# Altium PCB DE-060718.PcbDoc
Units mm, origin at the board's own origin, x right, y up, seen from the top; angles counter-clockwise.
Board outline 99.21 x 26.19 mm, 2 copper layers (Top Layer, Bottom Layer); 58 components, 38 nets, 211 pads, 34 vias.
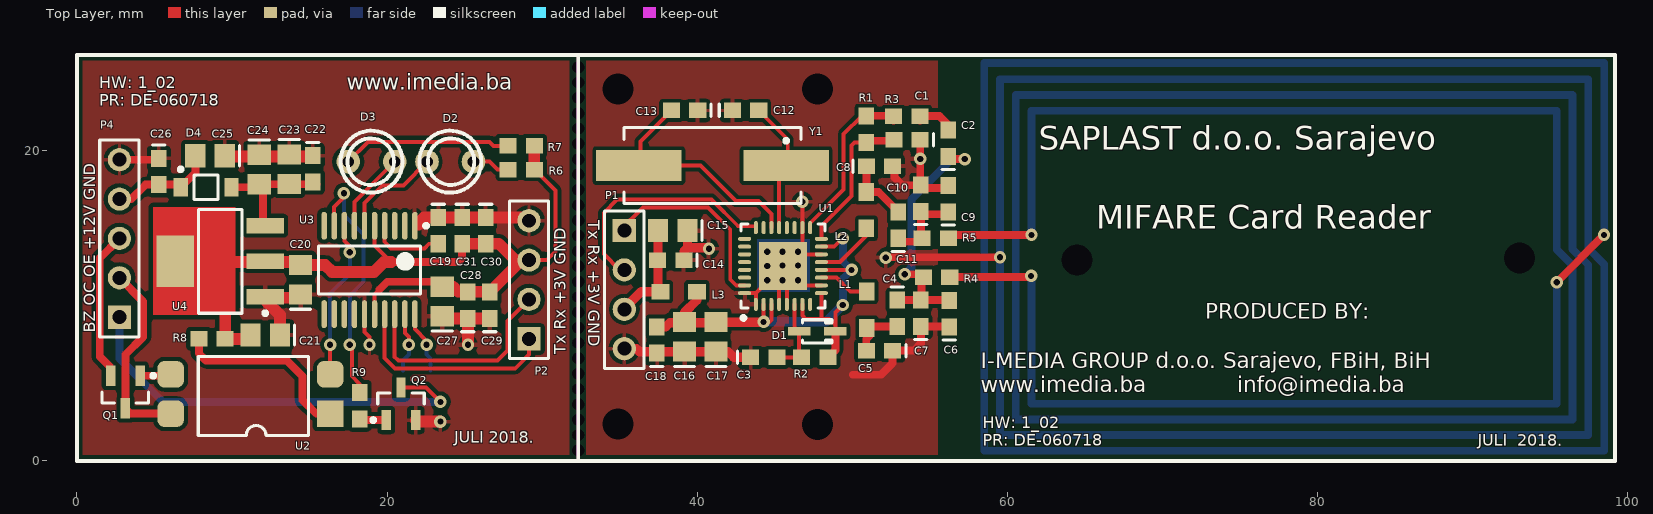
[diagram p0: Top Layer view]
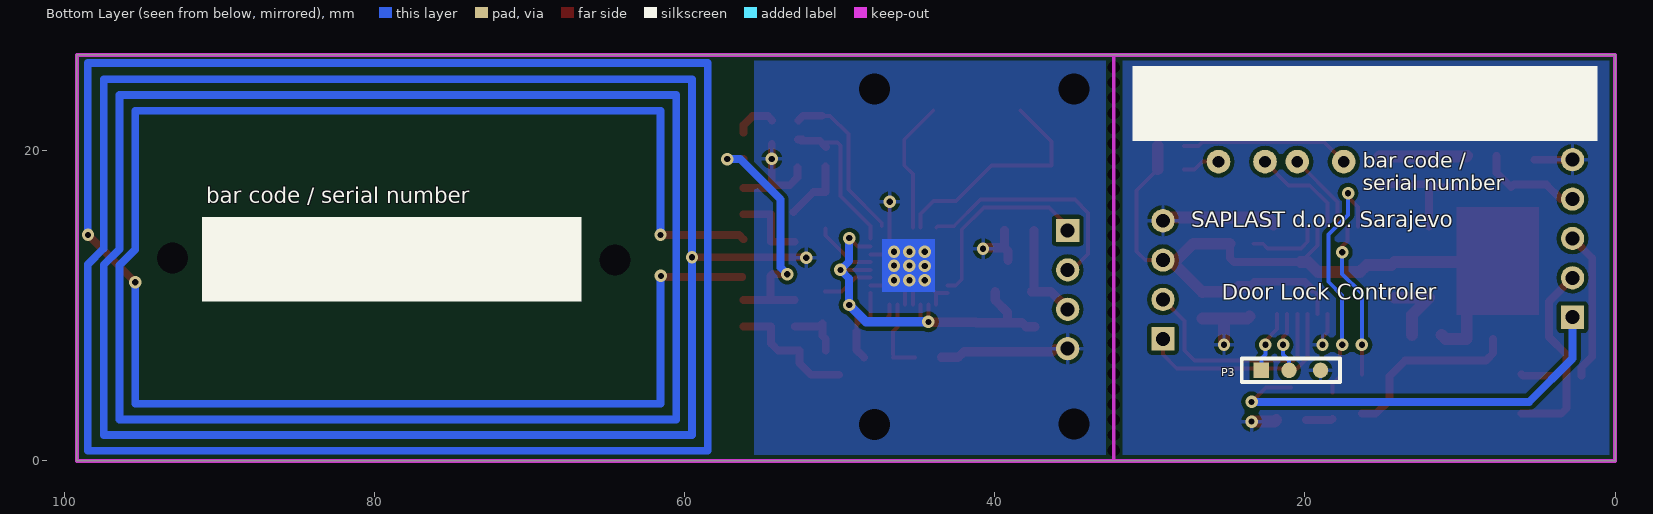
[diagram p1: Bottom Layer view, seen from below]

## Layer stack, top to bottom
Top Solder: solder mask 0.0102, Solder Resist, Dk 3.5
Top Layer: signal copper 0.0356
Dielectric 1: dielectric 0.32, FR-4, Dk 4.8
Bottom Layer: signal copper 0.0356
Bottom Solder: solder mask 0.0102, Solder Resist, Dk 3.5

## Board outline
0,0 0,26.187 99.212,26.187 99.212,0

## Design rules (kind name [scope] priority, off if disabled: settings)
Clearance [All] p1: gap=0.254 ignorepadtopadclearanceinfootprint=FALSE
PolygonConnect [All] p1: connectstyle=Relief reliefconductorwidth=0.254 reliefentries=4 polygonreliefangle="90 Angle" airgapwidth=0.254
RoutingVias [All] p1: holewidth=0.711 width=1.27 viastyle="Through Hole" minholewidth=0.711 minwidth=1.27 maxholewidth=0.711 maxwidth=1.27
SolderMaskExpansion [All] p1: expansion=0.102
Width [All] p1: maxlimit=3 minlimit=0.254 preferedwidth=0.762
30 further rules are at their usual default settings.

## Components (designator, comment, footprint, x,y, rotation, side; value= is the part's Value field where it differs from the comment)
C1 "100nF" 0603 53.543,20.726 r180 top
C2 "1nF" 0603 56.21,20.498 r90 top
C3 "1uF" 0603 44.298,6.68 r0 top
C4 "22pF" 0603 52.908,9.525 r270 top value=15pF
C5 "220pF" 0603 51.765,7.112 r180 top value=47pF
C6 "NF" 0603 56.261,9.5 r90 top value=33pF
C7 "100pF" 0603 54.432,9.525 r90 top value=10pF
C8 "220pF" 0603 51.765,18.999 r0 top value=47pF
C9 "NF" 0603 56.21,16.916 r90 top value=33pF
C10 "100pF" 0603 54.432,16.942 r90 top value=10pF
C11 "22pF" 0603 52.984,15.215 r90 top value=15pF
C12 "15pF" 0603 43.129,22.606 r0 top
C13 "15pF" 0603 39.192,22.606 r180 top
C14 "100nF" 0603 38.303,12.954 r180 top
C15 "10uF" 0805 38.43,14.859 r180 top
C16 "10uF" 0805 39.192,8.001 r90 top
C17 "10uF" 0805 41.224,8.001 r90 top
C18 "100nF" 0603 37.414,7.798 r90 top
C19 "100nF" 0603 23.317,14.859 r270 top
C20 "10uF" 0805 14.427,11.684 r90 top
C21 "10uF" 0805 12.141,8.128 r180 top
C22 "100nF" 0603 15.215,18.847 r270 top
C23 "10uF" 0805 13.691,18.821 r270 top
C24 "10uF" 0805 11.76,18.796 r270 top
C25 "10uF" 0805 8.585,19.685 r180 top
C26 "100nF" 0603 5.283,18.669 r270 top
C27 "10uF" 0805 23.571,10.287 r90 top
C28 "100nF" 0603 25.222,10.033 r90 top
C29 "100nF" 0603 26.619,10.033 r90 top
C30 "1uF" 0603 26.365,14.859 r270 top
C31 "10nF" 0603 24.841,14.859 r270 top
D1 "1N4148" SOD323 47.752,8.357 r0 top
D2 "LED_1" "LED 3mm" 24.079,19.304 r0 top
D3 "LED_2" "LED 3mm" 18.999,19.304 r180 top
D4 "ZD6V8" ONSC-SOD-123-2-425-04_V 8.331,17.653 r0 top
L1 "560nH" SMD-0805 50.952,9.754 r270 top
L2 "560nH" SMD-0805 50.927,16.18 r90 top
L3 "74279207" SMD-0805 38.811,10.922 r0 top
P1 "uC" HDR1X4 35.306,14.859 r270 top
P2 "MFRC" HDR1X4 29.159,7.874 r90 top
P3 "ICSP" ICSP 21.031,5.842 r180 bottom
P4 "CON1" HDR1X5 2.743,9.271 r90 top
Q1 "MMBT2222" SOT23_N 3.124,4.445 r270 top
Q2 "MMBT2222" SOT23_N 20.904,3.683 r90 top
R1 "1K8" ERA-0603 50.902,21.387 r90 top
R2 "10K" ERA-0603 47.6,6.68 r0 top
R3 "1K8" ERA-0603 53.518,22.225 r180 top
R4 "1R8" ERA-0603 55.448,11.862 r180 top
R5 "1R8" ERA-0603 55.372,14.351 r180 top
R6 "120R" ERA-0603 28.651,18.796 r180 top
R7 "120R" ERA-0603 28.651,20.32 r180 top
R8 "120R" ERA-0603 8.712,7.874 r0 top
R9 "1K" ERA-0603 18.237,3.556 r90 top
U1 "MFRC522" QFN32 45.542,12.573 r90 top
U2 "PC817" SOP4 16.332,3.048 r180 top
U3 "STM32F030F4P6" STM-TSSOP20_N 18.872,12.319 r270 top
U4 "AMS1117-3.3" SOT-223_N 9.246,12.878 r180 top
Y1 "27,12 MHz" HC49/4H_SMX 40.996,19.05 r180 top

## Footprints (in the part's own frame and the unit in brackets; to place one, negate y for a bottom-side part, rotate by r counter-clockwise, add the part's x,y. Pads: shape width x height; smd on the part's side, far side on the other; paste and mask are expansions set on the pad)
0603 [mm] "Chip Capacitor; Body 1.6 x 0.8 mm (LxW typ)"
  rect 1.1x1 smd: 1(-0.85,0) 2(0.85,0)
  silkscreen extent -1.7,-0.4 -1.7,0.4
0805 [mm] "Chip Capacitor; Body 2.0 x 1.2 mm (LxW typ)"
  rect 1.3x1.5 smd: 1(-0.95,0) 2(0.95,0)
  silkscreen extent -1.9,-0.65 -1.9,0.65
ERA-0603 [mm] "Chip Resistor; Body 1.6 x 0.8 mm (LxW typ)"
  rect 1.1x1 smd: 1(-0.85,0) 2(0.85,0)
HC49/4H_SMX [mm] "Surface Mount Quartz Crystal; Body 13.4 (inc. leads) x 4.9 mm (LxW max)"
  rect 5.5x2 smd: 1(-4.75,0) 2(4.75,0)
  silkscreen extent -5.7,-2.45 5.7,2.45
HDR1X4 [mm] "Connector; Header; 4 Position"
  rect 1.5x1.5 hole 0.9: 1(0,0)
  round 1.5 hole 0.9: 2(2.54,0) 3(5.08,0) 4(7.62,0)
  silkscreen extent -1.27,-1.27 8.89,1.27
HDR1X5 [mm] "Connector; Header; 5 Position"
  rect 1.5x1.5 hole 0.9: 1(0,0)
  round 1.5 hole 0.9: 2(2.54,0) 3(5.08,0) 4(7.62,0) 5(10.16,0)
  silkscreen extent -1.27,-1.27 11.43,1.27
ICSP [mm] "3 PIN ICSP PROGRAMMER CONNECTION PADS"
  rect 1x1 smd: 1(-1.778,0)
  round 1 smd: 2(0,0) 3(2.032,0)
  silkscreen extent -3.05,-0.76 3.3,0.76
"LED 3mm" [mil] "LED 3mm"
  round 60 hole 30: 1(-59.06,0) 2(59.06,0)
  silkscreen extent -79,-79 79,79
ONSC-SOD-123-2-425-04_V [mm] "SOD, 2-Leads, Body 2.69x1.6mm"
  rect 0.91x1.22 smd: 1(-1.635,0) 2(1.635,0)
  silkscreen extent -1.76,-0.8 0.78,1.28, body extent -1.35,-0.8 1.35,0.8, height 1.35
QFN32 [mm] "32 pin QFN"
  oval 0.85x0.25 smd: 1(-2.475,1.75) 2(-2.475,1.25) 3(-2.475,0.75) 4(-2.475,0.25) 5(-2.475,-0.25) 6(-2.475,-0.75) 7(-2.475,-1.25) 8(-2.475,-1.75) 17(2.475,-1.75) 18(2.475,-1.25) 19(2.475,-0.75) 20(2.475,-0.25) 21(2.475,0.25) 22(2.475,0.75) 23(2.475,1.25) 24(2.475,1.75)
  oval 0.25x0.85 smd: 9(-1.75,-2.475) 10(-1.25,-2.475) 11(-0.75,-2.475) 12(-0.25,-2.475) 13(0.25,-2.475) 14(0.75,-2.475) 15(1.25,-2.475) 16(1.75,-2.475) 25(1.75,2.475) 26(1.25,2.475) 27(0.75,2.475) 28(0.25,2.475) 29(-0.25,2.475) 30(-0.75,2.475) 31(-1.25,2.475) 32(-1.75,2.475)
  rect 3.1x3.1 smd: 33(0,0)
  silkscreen extent -3.47,-2.7 2.7,2.7, body extent -2.55,-2.55 2.55,2.55, height 0.8
SMD-0805 [mm] "Chip Inductor, 2-Leads, Body 2.0x1.2x1.1 mm"
  rect 1.15x1 smd: 1(-1.175,0) 2(1.175,0)
  body extent -1,-0.6 1,0.6, height 1.1
SOD323 [mm] "SOD-323/SC-76; 2 Leads; Body 1.7 x 1.3 mm, (LxW)"
  rect 1.45x0.55 smd: 1(1.175,0) 2(-1.175,0)
  silkscreen extent -0.95,-0.75 0.95,0.75
SOP4 [mm]
  rect 1.7x1.7 smd: 1(0,0)
  rrect50% 1.7x1.7 smd: 2(0,-2.54) 3(10.287,-2.54) 4(10.287,0)
  silkscreen extent 1.4,-3.68 8.51,1.4
SOT23_N [mm] "SOT23, 3-Leads, Body 2.9x1.3mm, Pitch 0.95mm, Lead Span 2.3mm, IPC Medium Density"
  rect 1.3x0.6 smd: 1(-1.05,0.95) 2(-1.05,-0.95) 3(1.05,0)
  silkscreen extent -1.17,-1.5 0.7,1.93, body extent -0.7,-1.5 0.7,1.5, height 1.1
SOT-223_N [mm] "SOT223, 4-Leads, Body 6.5x3.5mm, Pitch 2.3mm, Lead Span 7mm, IPC Medium Density"
  rect 2.4x1 smd: 1(-2.9,2.3) 2(-2.9,0) 3(-2.9,-2.3)
  rect 2.4x3.3 smd: 4(2.9,0)
  silkscreen extent -3.03,-3.35 1.4,3.47, body extent -1.85,-3.35 1.85,3.35, height 1.8
STM-TSSOP20_N [mm] "SOP, 20-Leads, Body 6.6x4.5mm, Pitch 0.65mm, IPC Medium Density"
  oval 1.8x0.35 smd: 1(-2.85,2.925) 2(-2.85,2.275) 3(-2.85,1.625) 4(-2.85,0.975) 5(-2.85,0.325) 6(-2.85,-0.325) 7(-2.85,-0.975) 8(-2.85,-1.625) 9(-2.85,-2.275) 10(-2.85,-2.925) 11(2.85,-2.925) 12(2.85,-2.275) 13(2.85,-1.625) 14(2.85,-0.975) 15(2.85,-0.325) 16(2.85,0.325) 17(2.85,0.975) 18(2.85,1.625) 19(2.85,2.275) 20(2.85,2.925)
  silkscreen extent -2.97,-3.3 1.55,3.78, body extent -2.25,-3.3 2.25,3.3, height 1.2

## Part data
C1 C2 C3 C4 C5 C6 C7 C8 C9 C10 C11 C12 C13 C14 C18 C19 C22 C26 C28 C29 C30 C31: library part C0603, "Ceramic Chip Capacitor - Standard", PackageDocument=Mar-2001, Code_IPC="1608 [0603]", Code_JEITA=0603, ComponentLink1Description="Manufacturer Link", ComponentLink1URL=http://www.kemet.com/, ComponentLink2Description=Datasheet, ComponentLink2URL=http://www.kemet.com/kemet/web/homepage/kechome.nsf/vapubfilesname/F3102TA.pdf/$file/F3102TA.pdf, DatasheetDocument=Mar-2001, LatestRevisionDate=19-Mar-2004, LatestRevisionNote="Silkscreen size reduced.", Note="Footprint corresponds to dimensions for bulk cassette packaging. This case size has tightened tolerances.", PackageReference=0603, Published=17-Jul-2002, Publisher="Altium Limited"
C15 C16 C17 C20 C21 C23 C24 C25 C27: library part C0805, "Ceramic Chip Capacitor - Standard", PackageDocument=Mar-2001, Code_IPC=2012[0805], Code_JEITA=0805, ComponentLink1Description="Manufacturer Link", ComponentLink1URL=http://www.kemet.com/, ComponentLink2Description=Datasheet, ComponentLink2URL=http://www.kemet.com/kemet/web/homepage/kechome.nsf/vapubfilesname/F3102TA.pdf/$file/F3102TA.pdf, DatasheetDocument=Mar-2001, LatestRevisionDate=19-Mar-2004, LatestRevisionNote="Silkscreen size reduced.", Note="Footprint corresponds to dimensions for bulk cassette packaging. This case size has tightened tolerances.", PackageReference=0805, Published=17-Jul-2002, Publisher="Altium Limited"
D1: library part 1PS76SB10, "Schottky Barrier Diode", ComponentLink1Description="Manufacturer Link", ComponentLink1URL=http://www.semiconductors.philips.com/, ComponentLink2Description=Datasheet, ComponentLink2URL=http://www.semiconductors.philips.com/acrobat/datasheets/1PS76SB10_2.pdf, DatasheetVersion=14-Oct-1996, LatestRevisionDate=19-Mar-2004, LatestRevisionNote="Silkscreen size reduced.", PackageDescription="SOD-323/SC-76; 2 Leads; Body 1.7 x 1.3 mm, (LxW)", PackageReference=SOD323, PackageVersion=May-1999, Published=17-Sep-2003, Publisher="Altium Limited"
D2 D3: library part "LED 3mm"
D4: library part SZMMSZ6V8T1G, "Zener Voltage Regulator, 500 mW, 2-Pin SOD-123, Pb-Free, Tape and Reel", Manufacturer="On Semiconductor", Supplier Part Number 1=SZMMSZ6V8T1G-ND, ComponentLink1Description="Manufacturer URL", ComponentLink1URL=http://www.onsemi.com/, ComponentLink2Description=Datasheet, ComponentLink2URL=http://www.onsemi.com/pub_link/Collateral/MMSZ2V4T1-D.PDF, ComponentLink3Description="Package Specification", ComponentLink3URL=http://www.onsemi.com/pub_link/Collateral/425-04.PDF, DatasheetVersion="Rev. 11", Mounting Technology="Surface Mount", PackageDescription="2-Pin SOD, Body 1.6 x 2.69 mm", PackageReference=SOD-123-2-425-04, PackageVersion="Rev. G, 10/2009", Packing="Tape and Reel", PartNumber=SZMMSZ6V8T1G, P Max (W)=0.5, RoHS=Pb-Free, Supplier 1=Digi-Key, Supplier 2=Mouser, Supplier Part Number 2=863-SZMMSZ6V8T1G
L1 L2: library part 74279207, "SMD EMI Suppression Ferrite Bead WE-CBF, Z = 100 Ohm", ComponentLink1Description="Manufacturer URL", ComponentLink1URL=http://www.we-online.com, ComponentLink2Description=Datasheet, ComponentLink2URL=http://www.we-online.de/katalog/media/pdf/74279207.pdf, DatasheetVersion=Dec-2005, Impedance="100 Ohm", PackageDescription="Chip Inductor, 2-Leads, Body 2.0 x 1.2 mm", PackageReference=SMD-0805, PartNumber=74279207
L3: "SMD EMI Suppression Ferrite Bead WE-CBF, Z = 100 Ohm", ComponentLink1Description="Manufacturer URL", ComponentLink1URL=http://www.we-online.com, ComponentLink2Description=Datasheet, ComponentLink2URL=http://www.we-online.de/katalog/media/pdf/74279207.pdf, DatasheetVersion=Dec-2005, Impedance="100 Ohm", PackageDescription="Chip Inductor, 2-Leads, Body 2.0 x 1.2 mm", PackageReference=SMD-0805, PartNumber=74279207
P1 P2: library part "Header 4", "Header, 4-Pin", LatestRevisionDate=17-Jul-2002, LatestRevisionNote="Re-released for DXP Platform.", Publisher="Altium Limited"
P3: "ICSP connection pads"
P4: library part "Header 5", "Header, 5-Pin", LatestRevisionDate=17-Jul-2002, LatestRevisionNote="Re-released for DXP Platform.", Publisher="Altium Limited"
Q1 Q2: library part BC817, "NPN General-purpose Transistor", ComponentLink1Description="Manufacturer Link", ComponentLink1URL=http://www.semiconductors.philips.com/, ComponentLink2Description=Datasheet, ComponentLink2URL=http://www.semiconductors.philips.com/acrobat/datasheets/BC817_BC817W_BC337_5.pdf, DatasheetVersion=Jun-1999, LatestRevisionDate=12-Dec-2006, LatestRevisionNote="IPC-7351 Footprint Added.", PackageDescription="3-Pin SOT-23 Package 0.95 mm Pitch, 2.3 mm Lead Span", PackageReference=SOT23, PackageVersion=May-1999, Published=17-Sep-2003, Publisher="Altium Limited"
R1 R2 R3 R4 R5 R6 R7 R8 R9: library part ERJ3RS, "Low Ohmic Value Thick Film Chip Resistor, 0.1 Ohm to 0.2 Ohm Range, 1%, 2% and 5% Tolerance, 0603 Size, 0.1 W", PackageDocument=Mar-2003, Code_IPC="1608 [0603]", ComponentLink1Description="Manufacturer Link", ComponentLink1URL=http://www.panasonic.com/industrial/components/resistive_products.htm, ComponentLink2Description=Datasheet, ComponentLink2URL=http://www.panasonic.com/industrial/components/pdf/AOA0000CE3.pdf, LatestRevisionDate=19-Mar-2004, LatestRevisionNote="Silkscreen size reduced.", PackageReference=3-0603, Published=17-Dec-2003, Publisher="Altium Limited"
U1: "MIFARE reader writer"
U2: library part "PC817 optocoupler", "4-Pin Phototransistor Optocoupler", DatasheetVersion=Nov-2003, LatestRevisionDate=04-Mar-2005, LatestRevisionNote="Sch pins 3 & 4 Swapped.", PackageReference=DIP-4, Published=24-Mar-1999, Publisher="Altium Limited"
U3: "ARM Cortex-M0 32-bit MCU, 16 KB Flash, 4 KB Internal RAM, 15 I/Os, 20-pin TSSOP, -40 to 85 degC, Tube", I/Os (High Current)=15, Operating Frequency(F) (Processor speed) (MHz)=48, Supplier Part Number 1=497-14044-5-ND, Supply Voltage(Vcc) min (V)=2.4, ComponentLink1Description="Manufacturer URL", ComponentLink1URL=http://www.st.com/web/en/home.html, ComponentLink2Description=Datasheet, ComponentLink2URL=http://www.st.com/st-web-ui/static/active/en/resource/technical/document/datasheet/DM00088500.pdf, ComponentLink3Description="Package Specification", ComponentLink3URL=http://www.st.com/st-web-ui/static/active/en/resource/technical/document/datasheet/DM00065136.pdf, Core="ARM Cortex-M0", DatasheetVersion="Rev. 1", FLASH Size (Prog) (kB)=16, Internal RAM Size (kB)=4, Mounting Technology="Surface Mount", PackageDescription="20-Pin Thin Shrink Small Outline Package, 6.5 x 4.4 mm Body, 0.65 mm Pitch", PackageReference=TSSOP20, PackageVersion="Rev. 1, 11/2012", Packing=Tube, PartNumber=STM32F030F4P6, Supplier 1=Digi-Key, Supplier 2=Newark, Supplier 3=Mouser, Supplier Part Number 2=06X3648, Supplier Part Number 3=511-STM32F030F4P6
U4: library part LD1117AS33TR, "1A, Low Drop Positive Voltage Regulator, 3.3V, 4-Pin SOT-223, Tape and Reel", ComponentLink1Description="Manufacturer URL", ComponentLink1URL=http://www.st.com, ComponentLink2Description=Datasheet, ComponentLink2URL=http://www.st.com/internet/com/TECHNICAL_RESOURCES/TECHNICAL_LITERATURE/DATASHEET/CD00002116.pdf, DatasheetVersion=Dec-2011, PackageDescription="4-Pin SOT-223 Package, 6.5 x 3.5 mm Body, 2.3 mm Pitch, 7 mm Lead Span", PackageReference=SOT-223, PackageVersion=2010, PartNumber=LD1117AS33TR
Y1: library part HC49/4H_SMX, "Surface Mount Quartz Crystal", PackageDocument=18-Oct-1999, ComponentLink1Description="Manufacturer Link", ComponentLink1URL=http://www.cmac.com/mt/, ComponentLink2Description=Datasheet, ComponentLink2URL=http://www.cmac.com/mt/databook/crystals/smd/hc49_4h_smx.pdf, DatasheetDocument=18-Oct-1999, Note="PCB layout complies with manufacturer's recommendation.", PackageReference=HC49/4H_SMX, Published=17-Jul-2002, Publisher="Altium Limited"

## Free pads (board coordinates)
  round 0 hole 0.8: RUPA(32.334,0.686) RUPA(32.334,1.674) RUPA(32.334,2.663) RUPA(32.334,3.658) RUPA(32.334,4.64) RUPA(32.334,5.629) RUPA(32.334,6.617) RUPA(32.334,7.606) RUPA(32.334,8.594) RUPA(32.334,9.583) RUPA(32.334,10.571) RUPA(32.334,11.56) RUPA(32.334,12.549) RUPA(32.334,13.537) RUPA(32.334,14.526) RUPA(32.334,15.514) RUPA(32.334,16.503) RUPA(32.334,17.491) RUPA(32.334,18.48) RUPA(32.334,19.469) RUPA(32.334,20.457) RUPA(32.334,21.446) RUPA(32.334,22.434) RUPA(32.334,23.423) RUPA(32.334,24.411) RUPA(32.334,25.4)
  round 0 hole 2: RUPA(34.9,2.388) RUPA(34.9,24.003) RUPA(47.777,2.337) RUPA(47.777,24.003) RUPA(64.516,12.954) RUPA(93.04,13.081)

## Via types
v1: diameter 0.8, hole 0.4, Top Layer to Bottom Layer, 34 vias

## Nets (pads, with @x,y where several pads share a name; then routed paths per layer and width w, separated by ;. In a path a pad name is that pad's centre, name@x,y a point inside that pad or via, vN(x,y) a via of type N, cw(c..) or ccw(c..) an arc to the next point about the centre after c; other vN are vias at no path point)
+3V3: C20.2 C21.2 C27.2 C28.2 C29.2 C30.2 C31.2 P2.3 R6.1 R7.1 R8.2 U3.5 U3.16 U4.2 U4.4 | length 49.7
  Top Layer w0.254: U3.16 19.197,10.739 19.507,11.049 ; U3.5 19.197,13.899 20.269,12.827 ; P2.3 30.302,12.954 30.861,13.513 30.861,17.436 R6.1
  Top Layer w0.508: 19.507,11.049 20.015,11.557 23.251,11.557 C27.2 ; 20.269,12.827 24.587,12.827 24.841,13.081 C31.2
  Top Layer w0.737: C27.2 24.272,11.237 24.587,10.922 26.58,10.922 C29.2 P2.3@28.69,12.954 ; C31.2 C30.2 27.215,14.009 28.27,12.954 P2.3@28.69,12.954 ; P2.3 P2.3@28.69,12.954 ; R6.1 R7.1
  Top Layer w0.762: 9.562,9.867 R8.2 10.937,7.874 C21.2 ; 9.601,12.954 9.728,12.827 14.234,12.827 C20.2 16.017,12.634 16.459,12.192 19.163,12.192 19.798,12.827 20.269,12.827
+5V: C22.2 C23.2 C24.2 D4.2 U4.3 | length 8.4
  Top Layer w0.508: D4.2 11.567,17.653 C24.2 ; U4.3@11.993,15.127 11.993,17.613 C24.2 ; C22.2@15.47,17.846 13.792,17.846 C24.2
+12V: C25.2 C26.2 D4.1 P4.4 | length 6.8
  Top Layer w0.508: P4.4 3.505,16.891 4.433,17.819 C26.2 6.53,17.819 D4.1 7.635,18.592 C25.2
BUZZ: R9.2 U3.9 | length 16.4
  Top Layer w0.254: U3.9@16.586,15.113 16.586,16.383 17.221,17.018 v1(17.221,17.272) ; v1(17.602,7.493) 17.729,7.366 17.729,5.461 18.237,4.953 R9.2
  Bottom Layer w0.254: v1(17.221,17.272) 17.221,15.875 18.491,14.605 18.491,11.557 17.602,10.668 v1(17.602,7.493)
BUZZER: P4.1 Q2.3 | length 27.4
  Top Layer w0.254: Q2.3 22.521,4.733 v1(23.444,3.81)
  Bottom Layer w0.508: P4.1 2.743,6.604 5.537,3.81 v1(23.444,3.81)
DOOR_LOCK: U2.2 U3.8 | length 10.3
  Top Layer w0.254: U2.2 v1(16.332,7.493) ; U3.8 17.247,14.198 17.602,13.843 v1(17.602,13.462)
  Bottom Layer w0.254: v1(16.332,7.493) 16.332,10.795 17.602,12.065 v1(17.602,13.462)
LED_1: D2.1 U3.6 | length 6.6
  Top Layer w0.254: U3.6 18.547,16.634 19.694,17.78 21.055,17.78 D2.1
LED_2: D3.1 U3.7 | length 5.2
  Top Layer w0.254: U3.7 17.897,16.702 D3.1
NetC2_1: C2.1 C4.1 C6.2 C7.2 R4.2 | length 16.5
  Top Layer w0.508: C4.1 C7.2 C6.2@56.21,10.375 ; v1(53.391,12.04) 54.319,12.04 54.344,12.065 54.471,11.938 C7.2@54.471,10.414 ; C2.1@56.21,19.47 v1(57.263,19.47)
  Bottom Layer w0.508: v1(53.391,12.04) 53.823,12.471 53.823,16.866 56.427,19.47 v1(57.263,19.47)
NetC2_2: C2.2 R3.1 | length 2.7
  Top Layer w0.508: R3.1@54.368,21.971 54.647,22.25 55.626,22.25 56.21,21.666 C2.2@56.21,21.17
NetC3_2: C3.2 D1.2 R2.1 U1.6 | length 4.8
  Top Layer w0.254: C3.2 R2.1@46.577,6.68 ; U1.6 46.292,8.641 D1.2 R2.1@46.577,6.853
NetC4_2: C4.2 C5.2 L1.2 | length 3.7
  Top Layer w0.508: C5.2 50.915,7.862 51.13,8.077 51.13,8.858 51.313,8.675 C4.2
NetC8_1: C8.1 C11.2 L2.2 | length 4.2
  Top Layer w0.508: C8.1@50.927,18.987 L2.2 51.694,17.355 C11.2
NetC9_1: C9.1 C10.1 C11.1 R5.2 | length 5.1
  Top Layer w0.508: C11.1@52.908,14.136 54.432,14.136 54.432,15.914 C9.1@56.21,15.914
NetC19_2: C19.2 U3.4 | length 4.8
  Top Layer w0.254: U3.4 19.847,14.138 20.269,13.716 22.428,13.716 22.721,14.009 C19.2
NetD2_2: D2.2 R6.2 | length 2.4
  Top Layer w0.254: D2.2 26.619,19.304 27.127,18.796 R6.2
NetD3_2: D3.2 R7.2 | length 10.9
  Top Layer w0.254: D3.2 18.769,20.574 26.619,20.574 26.873,20.32 R7.2
NetQ1_1: Q1.1 U2.3 | length 2
  Top Layer w0.508: Q1.1 5.952,5.495 U2.3
NetQ2_1: Q2.1 R9.1 | length 1.7
  Top Layer w0.508: R9.1 18.31,2.633 Q2.1
NetR8_1: R8.1 U2.1 | length 11.9
  Top Layer w0.508: R8.1 7.862,6.946 8.331,6.477 13.538,6.477 14.554,5.461 14.554,3.937 15.443,3.048 U2.1
OSCIN: C12.2 U1.21 Y1.1 | length 8.6
  Top Layer w0.254: C12.2 45.847,20.738 45.847,19.05 45.292,18.495 U1.21
OSCOUT: C13.2 U1.22 Y1.2 | length 15
  Top Layer w0.254: C13.2 36.347,20.611 36.347,19.05 40.234,19.05 42.52,16.764 43.967,16.764 44.792,15.939 U1.22
OUT_C: P4.2 Q1.3 U2.4 | length 12.6
  Top Layer w0.508: P4.2 4.267,10.287 4.267,8.001 3.124,6.858 Q1.3 3.471,3.048 U2.4
OUT_E: P4.3 Q1.2 | length 9.7
  Top Layer w0.508: Q1.2 2.174,6.03 1.473,6.731 1.473,13.081 P4.3
RX: R1.2 R3.2 U1.17 | length 10.7
  Top Layer w0.254: U1.17@47.3,15.144 47.3,15.347 49.454,17.501 49.454,21.082 50.634,22.262 R1.2@51.156,22.262
  Top Layer w0.508: R1.2@51.156,22.262 52.377,22.262 R3.2@52.668,21.971
SWCLK: P3.1 U3.20 | length 4
  Top Layer w0.254: U3.20 21.797,8.505 22.555,7.747 v1(22.555,7.493)
  Bottom Layer w0.254: v1(22.555,7.493) 22.555,6.858 22.809,6.604 P3.1
SWDIO: P3.2 U3.19 | length 3.9
  Top Layer w0.254: U3.19 21.147,8.266 21.412,8.001 v1(21.412,7.493)
  Bottom Layer w0.254: P3.2 21.031,6.477 21.412,6.858 v1(21.412,7.493)
TX1: L1.1 U1.11 | length 3.3
  Top Layer w0.254: U1.11 48.985,11.823 49.879,10.929 L1.1
TX2: L2.1 U1.13 | length 4.1
  Top Layer w0.254: U1.13 49.221,12.823 50.927,14.529 L2.1
UART_RX: P1.2 U1.24 | length 15
  Top Layer w0.254: P1.2@35.001,12.319 33.985,13.335 33.985,16.002 34.849,16.866 40.927,16.866 42.654,15.138 43.696,15.138 U1.24@43.786,15.048
UART_TX: P1.1 U1.31 | length 12.7
  Top Layer w0.254: P1.1@35.001,14.859 36.5,16.358 40.716,16.358 42.139,14.935 42.139,11.709 42.525,11.323 U1.31
USART_RX: P2.2 U3.18 | length 14.3
  Top Layer w0.254: U3.18 20.497,6.713 20.734,6.477 27.127,6.477 27.762,7.112 27.762,9.017 P2.2
USART_TX: P2.1 U3.17 | length 13.8
  Top Layer w0.254: U3.17 19.847,6.645 20.523,5.969 28.27,5.969 29.159,6.858 P2.1
VDD1: C14.2 C15.2 L3.1 P1.3 | length 7.1
  Top Layer w0.6: P1.3@35.001,9.779 35.255,9.779 36.398,10.922 L3.1 37.48,11.078 C15.2
VDD2: C16.2 C17.2 C18.2 D1.1 L3.2 R2.2 U1.2 U1.3 U1.7 U1.9 U1.12 U1.15 | length 34.5
  Top Layer w0.254: v1@44.292,8.951 44.663,8.951 44.792,9.08 U1.3 ; v1(44.292,8.971) U1.2 ; U1.7 46.792,9.367 46.99,9.169 47.955,9.169 ; U1.9 48.017,9.231 47.955,9.169 ; U1.12 v1(49.966,12.323) ; U1.15 48.85,13.823 v1(49.403,14.376) ; D1.1 48.927,8.756 ; v1(49.403,10.058) 48.927,9.582 48.927,8.756 ; 47.955,9.169 48.514,9.169 48.927,8.756
  Top Layer w0.508: R2.2 48.927,7.158 D1.1
  Top Layer w0.6: C18.2 37.985,8.648 38.252,8.915 C16.2@39.192,8.915 ; L3.2 39.986,10.37 39.192,9.576 C16.2 C16.2@39.192,8.915 ; v1@44.292,8.951 C17.2 41.189,8.915 C16.2@39.192,8.915
  Bottom Layer w0.508: v1(49.403,10.058) 49.403,11.76 v1(49.966,12.323) ; v1(49.403,14.376) 49.403,12.886 v1@49.944,12.344
  Bottom Layer w0.6: v1(44.292,8.971) 48.316,8.971 v1(49.403,10.058)
VMID: C1.2 R1.1 U1.16 | length 10
  Top Layer w0.254: U1.16@48.017,14.349 48.017,15.142 49.962,17.087 49.962,20.345 50.153,20.537 R1.1
  Top Layer w0.508: R1.1@50.902,20.244 51.308,20.65 52.49,20.65 52.414,20.726 C1.2
VSS: C19.1 C20.1 C21.1 C22.1 C23.1 C24.1 C25.1 C26.1 C27.1 C28.1 C29.1 C30.1 C31.1 P2.4 P3.3 P4.5 Q2.2 U3.1 U3.15 U4.1 | length 29.2
  Top Layer w0.254: U3.15 18.547,8.326 18.872,8.001 v1(18.872,7.493)
  Top Layer w0.508: P4.5 C26.1@5.195,19.431
  Top Layer w0.762: C25.1 9.574,19.646 C22.1@15.215,19.646 ; C21.1 13.091,9.429 11.993,10.527 C20.1@14.22,10.527 ; Q2.2 21.947,2.54 v1(23.444,2.54) ; 22.047,15.24 22.047,15.367 22.389,15.709 C19.1 C31.1 C30.1 28.944,15.709 P2.4 ; C27.1 23.725,9.183 C28.1 ; v1(25.222,7.493) C28.1 ; C29.1 C28.1
VSS2: C1.1 C3.1 C5.1 C6.1 C7.1 C8.2 C9.2 C10.2 C12.1 C13.1 C14.1 C15.1 C16.1 C17.1 C18.1 P1.4 R4.1 R5.1 U1.1 U1.4 U1.5 U1.10 U1.14 U1.18 U1.32 | length 530.9
  Top Layer w0.254: U1.32 43.792,10.823 ; U1.1 43.792,10.823 ; U1.4 v1@45.292,12.323 ; v1@45.542,12.573 v1@45.292,12.323 ; U1.5 v1@45.792,12.323 ; v1@46.292,13.323 U1.14 ; 46.792,11.323 U1.10 ; 46.792,13.823 v1@46.792,16.713 ; 43.792,10.823 v1@45.292,12.323
  Top Layer w0.5: v1(52.172,13.106) 52.197,13.132 v1(59.538,13.132) ; R5.1@56.222,14.3 56.501,14.58 v1(61.57,14.58) ; R4.1 61.468,11.862 v1(61.544,11.938) ; v1(95.453,11.532) v1(98.501,14.58)
  Top Layer w0.508: 50.063,5.563 51.867,5.563 52.615,6.311 C5.1 53.975,7.112 54.432,7.569 C7.1 C6.1@56.21,8.675 ; C8.2@52.742,18.935 52.742,18.276 53.238,17.78 54.266,17.78 54.393,17.653 C1.1@54.393,20.447 ; C10.2@54.432,17.614 C9.2@56.21,17.614
  Top Layer w0.6: P1.4@35.001,7.239 36.093,7.239 36.281,7.051 C16.1 C17.1 41.996,7.051 42.367,6.68 C3.1 ; C14.1 39.153,13.525 39.38,13.752 ; C15.1 39.38,13.752 ; v1@40.706,13.752 39.38,13.752
  Bottom Layer w0.5: 60.554,2.667 96.469,2.667 96.469,12.618 95.453,13.634 95.453,22.581 61.57,22.581 v1(61.57,14.58) ; 60.554,2.692 60.554,23.597 96.469,23.597 96.469,13.66 97.485,12.644 97.485,1.676 59.538,1.676 v1(59.538,13.132) 59.538,24.613 97.485,24.613 97.485,13.71 98.521,12.675 98.521,0.66 58.522,0.66 58.522,25.661 98.521,25.661 v1@98.521,14.58 ; v1@61.57,11.938 61.57,3.683 95.453,3.683 v1(95.453,11.532)
  other v1: 44.526,11.659 45.517,11.659 46.507,11.659 44.526,12.573 45.517,12.598 46.507,12.598 44.526,13.487 45.517,13.487 46.507,13.487 40.767,13.691 46.787,16.713 54.393,19.482
pads on no net: U1.8 U1.19 U1.20 U1.23 U1.25 U1.26 U1.27 U1.28 U1.29 U1.30 U1.33 U3.2 U3.3 U3.10 U3.11 U3.12 U3.13 U3.14

## Polygon pours and split planes (outlines as drawn)
VSS on Top Layer "Top Layer-No Net" (solid, remove dead copper, pour order 0): 31.75,26.187 31.75,0.134 0.076,0.134 0.076,26.187
VSS2 on Top Layer "Top Layer-No Net" (solid, remove dead copper, pour order 4): 55.524,26.187 55.524,0 32.868,0 32.868,26.187
VSS on Bottom Layer "Top Layer-No Net" (solid, remove dead copper, pour order 2): 0.178,26.01 31.75,26.01 31.75,0.152 0.178,0.152
VSS2 on Bottom Layer "Top Layer-No Net" (solid, remove dead copper, pour order 8): 55.524,26.187 55.524,0.203 32.868,0.203 32.868,26.187

## Keep-outs
Keep-Out Layer:
  lines w0.254: 32.334,0 32.334,26.137 ; 0,0 0,26.187 99.212,26.187 99.212,0 0,0

## Other copper
Top Layer:
  rectangle net +3V3: 4.902,9.398 10.236,16.383
Bottom Layer:
  rectangle net VSS2: 43.866,10.897 47.269,14.326

## Silkscreen, mask and mechanical layers (free items; w line width, h text height)
Top Overlay:
  lines w0.254: 32.334,0 32.334,26.137 ; 0,0 99.212,0 99.212,26.187 0,26.187 0,0
  text "www.imedia.ba" at 17.399,23.952 h1.02
  text "HW: 1_02 / PR: DE-060718" at 1.448,22.911 h0.76
  text "SAPLAST d.o.o. Sarajevo" at 62.052,20.066 h1.52
  text "Tx Rx +3V GND" at 32.969,15.519 h0.76 r270
  text "MIFARE Card Reader" at 65.735,14.986 h1.52
  text "PRODUCED BY:" at 72.771,9.169 h1.02
  text "BZ OC OE +12V GND" at 1.194,8.255 h0.76 r90
  text "Tx Rx +3V GND" at 31.521,6.883 h0.76 r90
  text "I-MEDIA GROUP d.o.o. Sarajevo, FBiH, BiH / www.imedia.ba             info@imedia.ba" at 58.293,4.445 h1.02
  text "JULI 2018." at 24.333,1.168 h0.76 r359.82
  text "JULI  2018." at 90.348,0.991 h0.76 r359.82
  text "HW: 1_02 / PR: DE-060718" at 58.42,0.965 h0.76
Bottom Overlay:
  rectangle: 1.118,20.65 31.14,25.476
  rectangle: 66.675,10.287 91.135,15.748
  text "bar code / / serial number" at 16.281,17.475 h0.97
  text "bar code / serial number" at 90.881,16.612 h1.02
  text "SAPLAST d.o.o. Sarajevo" at 27.33,15.062 h1.02
  text "Door Lock Controler" at 25.375,10.389 h1.02
Mechanical 1:
  lines w0.254: 31.572,-1.168 32.309,-0.432 32.309,-3.912 35.56,-7.163 71.78,-7.163 ; 32.309,-0.457 33.045,-1.194 ; 32.334,0 32.334,26.137 ; 0,0 99.212,0 99.212,26.187 0,26.187 0,0
  text "HOLES OR V-SHAPE" at 39.268,-6.528 h2.03

## Dimensions
58.522,25.661 to 98.521,25.661 on Mechanical 1
98.521,25.661 to 98.521,0.66 on Mechanical 1
32.715,26.492 to 99.212,26.187 on Mechanical 1
0,26.187 to 32.004,26.467 on Mechanical 1
0,26.187 to 0,0 on Mechanical 1